# Altium PCB PCB1.PcbDoc
Units mil, origin at the board's own origin, x right, y up, seen from the top; angles counter-clockwise.
Board outline 4385 x 2505 mil, 2 copper layers (Top Layer, Bottom Layer); 21 components, 20 nets, 99 pads, 0 vias.
Unrouted connection lines stored in the file: 46.
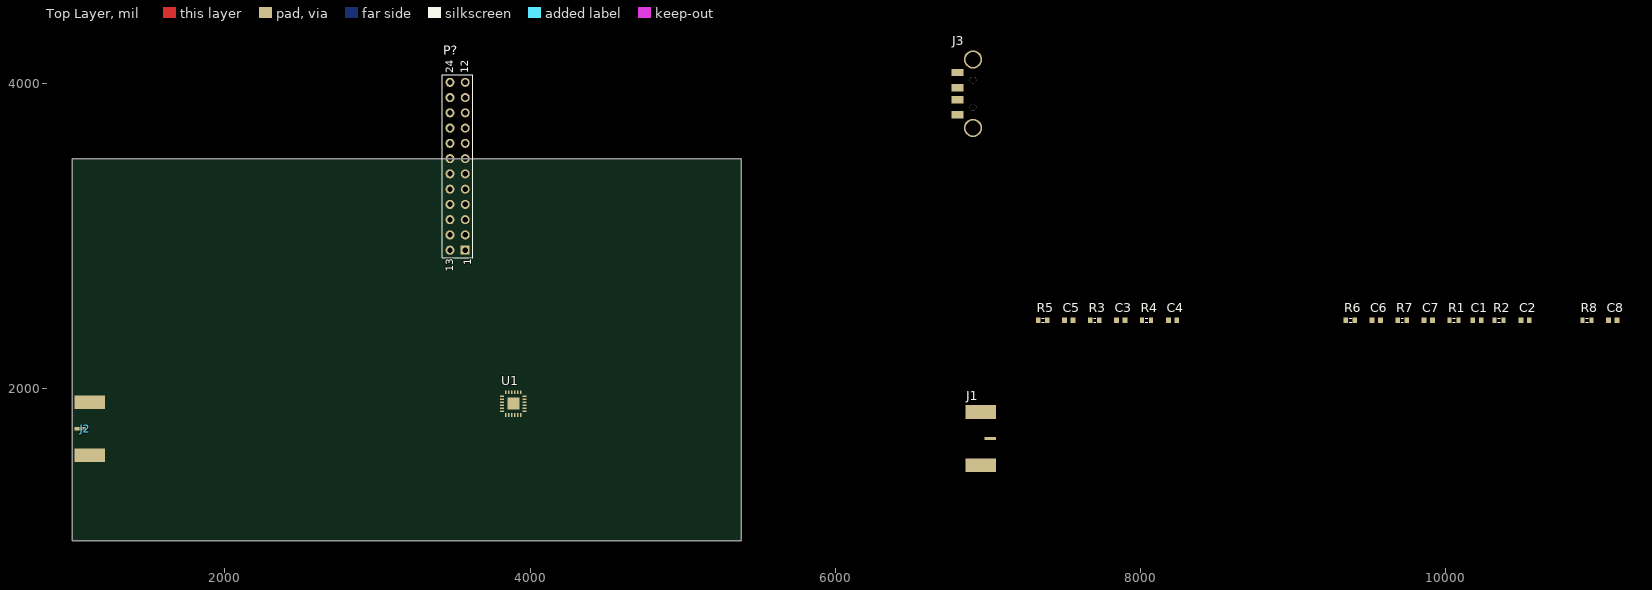
[diagram p0: Top Layer view]
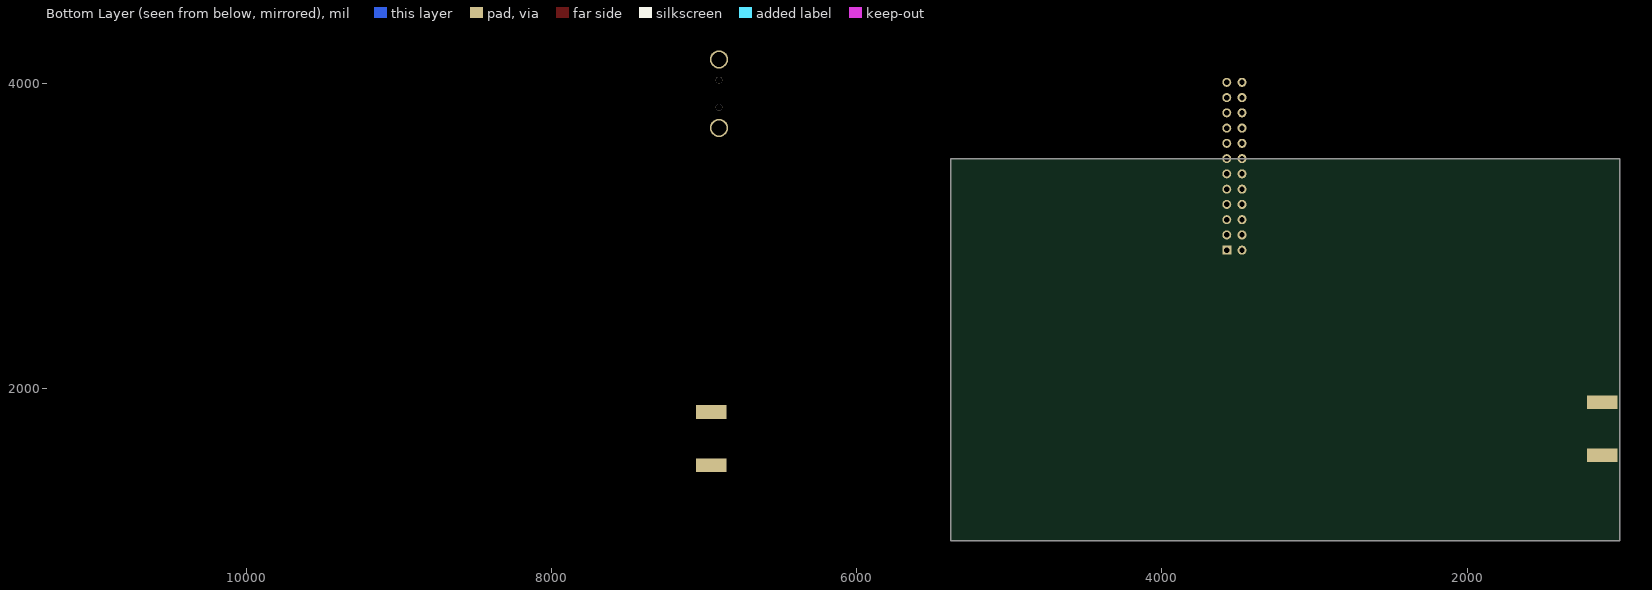
[diagram p1: Bottom Layer view, seen from below]

## Layer stack, top to bottom
Top Solder: solder mask 0.4, Solder Resist, Dk 3.5
Top Layer: signal copper 1.4
Dielectric 1: dielectric 12.6, FR-4, Dk 4.8
Bottom Layer: signal copper 1.4
Bottom Solder: solder mask 0.4, Solder Resist, Dk 3.5

## Board outline
1000,1000 5385,1000 5385,3505 1000,3505

## Design rules (kind name [scope] priority, off if disabled: settings)
Clearance [All] p1: gap=10 ignorepadtopadclearanceinfootprint=FALSE except(0: Arc-Hole Track-Hole SMDPad-Hole THPad-Hole Via-Hole Fill-Hole Poly-Hole Region-Hole Text-Hole)
PolygonConnect [All] p1: connectstyle=Relief reliefconductorwidth=10 reliefentries=4 polygonreliefangle="90 Angle" airgapwidth=10
RoutingVias [All] p1: holewidth=28 width=50 viastyle="Through Hole" minholewidth=28 minwidth=50 maxholewidth=28 maxwidth=50
SolderMaskExpansion [All] p1: expansion=4
Width [All] p1: maxlimit=10 minlimit=10 preferedwidth=10
30 further rules are at their usual default settings.

## Components (designator, comment, footprint, x,y, rotation, side; value= is the part's Value field where it differs from the comment)
C1 "Cap Semi" 1608[0603] 10205,2445 r0 top value=2pF
C2 "Cap Semi" 1608[0603] 10520,2445 r0 top value=2pF
C3 "Cap Semi" 1608[0603] 7870,2445 r0 top value=2pF
C4 "Cap Semi" 1608[0603] 8210,2445 r0 top value=2pF
C5 "Cap Semi" 1608[0603] 7530,2445 r0 top value=2pF
C6 "Cap Semi" 1608[0603] 9545,2445 r0 top value=2pF
C7 "Cap Semi" 1608[0603] 9885,2445 r0 top value=2pF
C8 "Cap Semi" 1608[0603] 11095,2445 r0 top value=100pF
J1 "SMA 50 Ohm edge" "SMA-OSHPARK-4L-1.6MM- ALT3" 7053.5,1670 r180 top
J2 "SMA 50 Ohm edge" "SMA-OSHPARK-4L-1.6MM- ALT3" 1015,1735 r0 top
J3 "USB-A-PLUG-1" USB-A-PLUG-1 6902.36,3930.63 r90 top
P? "Header 12X2A" HDR2X12_CEN 3575,2905 r90 top
R1 "Res3" J1-0603 10055,2445 r0 top value=5K
R2 "Res3" J1-0603 10350,2445 r0 top value=5K
R3 "Res3" J1-0603 7700,2445 r0 top value=5K
R4 "Res3" J1-0603 8040,2445 r0 top value=5K
R5 "Res3" J1-0603 7360,2445 r0 top value=5K
R6 "Res3" J1-0603 9375,2445 r0 top value=5K
R7 "Res3" J1-0603 9715,2445 r0 top value=5K
R8 "Res3" J1-0603 10925,2445 r0 top value=1K
U1 "IDT-F1958" VFQFPN-24 3890,1900 r0 top

## Footprints (in the part's own frame and the unit in brackets; to place one, negate y for a bottom-side part, rotate by r counter-clockwise, add the part's x,y. Pads: shape width x height; smd on the part's side, far side on the other; paste and mask are expansions set on the pad)
1608[0603] [mm] "Chip Capacitor, Body 1.6x0.8mm, IPC High Density"
  rect 0.8x0.9 smd: 1(-0.7,0) 2(0.7,0)
  body extent -0.87,-0.48 0.87,0.48, height 1.3
HDR2X12_CEN [mm] "Connector; Header; 12x2 Position"
  rect 1.5x1.5 hole 0.9: 1(0,0)
  round 1.5 hole 0.9: 2(2.54,0) 3(5.08,0) 4(7.62,0) 5(10.16,0) 6(12.7,0) 7(15.24,0) 8(17.78,0) 9(20.32,0) 10(22.86,0) 11(25.4,0) 12(27.94,0) 13(0,2.54) 14(2.54,2.54) 15(5.08,2.54) 16(7.62,2.54) 17(10.16,2.54) 18(12.7,2.54) 19(15.24,2.54) 20(17.78,2.54) 21(20.32,2.54) 22(22.86,2.54) 23(25.4,2.54) 24(27.94,2.54)
  silkscreen extent -1.27,-1.27 29.21,3.81
J1-0603 [mm] "Chip Resistor, Body 1.6x0.8mm, IPC High Density"
  rect 0.7x0.9 smd: 1(-0.75,0) 2(0.75,0)
  silkscreen extent -0.2,-0.35 0.2,0.35, body extent -0.85,-0.48 0.85,0.48, height 0.9
"SMA-OSHPARK-4L-1.6MM- ALT3" [mil] "Short and thin signal pin"
  rect 200x90 smd: GND(101,174) GND(101,-174)
  rect 200x90 smd far side: GND(101,174) GND(101,-174)
  rect 75x20 smd: SIG(38.5,0)
USB-A-PLUG-1 [mm]
  rect 1.2x2 smd: 1(3.5,2.6) 2(1,2.6) 3(-1,2.6) 4(-3.5,2.6)
  round 3.048 / inner round 1.524 / far side round 3.048 hole 2.5: M1(-5.7,0) M2(5.7,0)
  round 1.1 hole 1.1 unplated: MH1(-2.25,0) MH2(2.25,0)
VFQFPN-24 [mm]
  rect 2x2 smd: 0(0,0)
  rect 0.65x0.25 smd: 1(-1.875,1.25) 2(-1.875,0.75) 3(-1.875,0.25) 4(-1.875,-0.25) 5(-1.875,-0.75) 6(-1.875,-1.25) 13(1.875,-1.25) 14(1.875,-0.75) 15(1.875,-0.25) 16(1.875,0.25) 17(1.875,0.75) 18(1.875,1.25)
  rect 0.25x0.65 smd: 7(-1.25,-1.875) 8(-0.75,-1.875) 9(-0.25,-1.875) 10(0.25,-1.875) 11(0.75,-1.875) 12(1.25,-1.875) 19(1.25,1.875) 20(0.75,1.875) 21(0.25,1.875) 22(-0.25,1.875) 23(-0.75,1.875) 24(-1.25,1.875)

## Part data
C1 C2 C3 C4 C5 C6 C7 C8: "Capacitor (Semiconductor SIM Model)", LatestRevisionDate=29-May-2009, LatestRevisionNote="IPC-7351 Footprint Added.", PackageDescription="Chip Capacitor", PackageReference=C1206, Published=8-Jun-2000, Publisher="Altium Limited"
J1 J2: library part SMA-OSHPARK-4L-1.6MM-ALT3, Package=SMA-OSHPARK-4L-1.6MM, Supplier Part Number 1=J658-ND, DeviceName=-OSHPARK-4L-1.6MM, DeviceSetName=SMA, GateName_1=G1, LibraryName=dword1511-connectors, Supplier 1=Digi-Key, SymbolName_1=COAX
P?: "Header, 12-Pin, Dual row", LatestRevisionDate=17-Jul-2002, LatestRevisionNote="Re-released for DXP Platform.", Publisher="Altium Limited"
R1 R2 R3 R4 R5 R6 R7 R8: "Resistor", LatestRevisionDate=29-May-2009, LatestRevisionNote="IPC-7351 Footprint Added.", PackageDescription="Chip Resistor", PackageReference=J1-0603, Published=8-Jun-2000, Publisher="Altium Limited"
U1: Package=VFQFPN-24, DeviceSetName=IDT-F1958, GateName_1=G$1, LibraryName=wcsn_parts, SymbolName_1=F1958
J3: DeviceName=1, DeviceSetName=USB-A-PLUG-, GateName_1=G$1, LibraryName=dword1511-connectors, Package=USB-A-PLUG-1, SymbolName_1=USB-A-2S

## Nets (pads, with @x,y where several pads share a name; then routed paths per layer and width w, separated by ;. In a path a pad name is that pad's centre, name@x,y a point inside that pad or via, vN(x,y) a via of type N, cw(c..) or ccw(c..) an arc to the next point about the centre after c; other vN are vias at no path point)
5V: J3.1 R8.1
5V2: U1.2 U1.16
D0: C1.2 U1.1
D0IN: P?.13 R1.1
D1: C2.2 U1.24
D1IN: P?.14 R2.1
D2: C3.2 U1.23
D2IN: P?.15 R3.1
D3: C4.2 U1.22
D3IN: P?.16 R4.1
D4: C6.2 U1.21
D4IN: P?.17 R6.1
D5: C7.2 U1.20
D5IN: P?.18 R7.1
D6: C5.2 U1.19
D6IN: P?.19 R5.1
GND: C1.1 C2.1 C3.1 C4.1 C5.1 C6.1 C7.1 C8.2 J1.GND J2.GND J3.4 U1.0 U1.4 U1.6 U1.7 U1.8 U1.9 U1.10 U1.11 U1.12 U1.13 U1.15
NetC8_1: C8.1 R8.2
NetJ1_SIG: J1.SIG U1.5
NetJ2_SIG: J2.SIG U1.14
pads on no net: J3.2 J3.3 J3.M1 J3.M2 J3.MH1 J3.MH2 P?.1 P?.2 P?.3 P?.4 P?.5 P?.6 P?.7 P?.8 P?.9 P?.10 P?.11 P?.12 P?.20 P?.21 P?.22 P?.23 P?.24 R1.2 R2.2 R3.2 R4.2 R5.2 R6.2 R7.2 U1.3 U1.17 U1.18

## Text inside footprints (layer, text, board x,y; h text height)
P?: Top Overlay "1" at 3615,2805 h50 r90; Top Overlay "13" at 3495,2765 h50 r90; Top Overlay "12" at 3595,4065 h50 r90; Top Overlay "24" at 3495,4065 h50 r90